# Altium PCB PCB1.PcbDoc
Units mm, origin at the board's own origin, x right, y up, seen from the top; angles counter-clockwise.
Board outline 76.2 x 76.2 mm, 2 copper layers (Top Layer, Bottom Layer); 24 components, 34 nets, 116 pads, 0 vias.
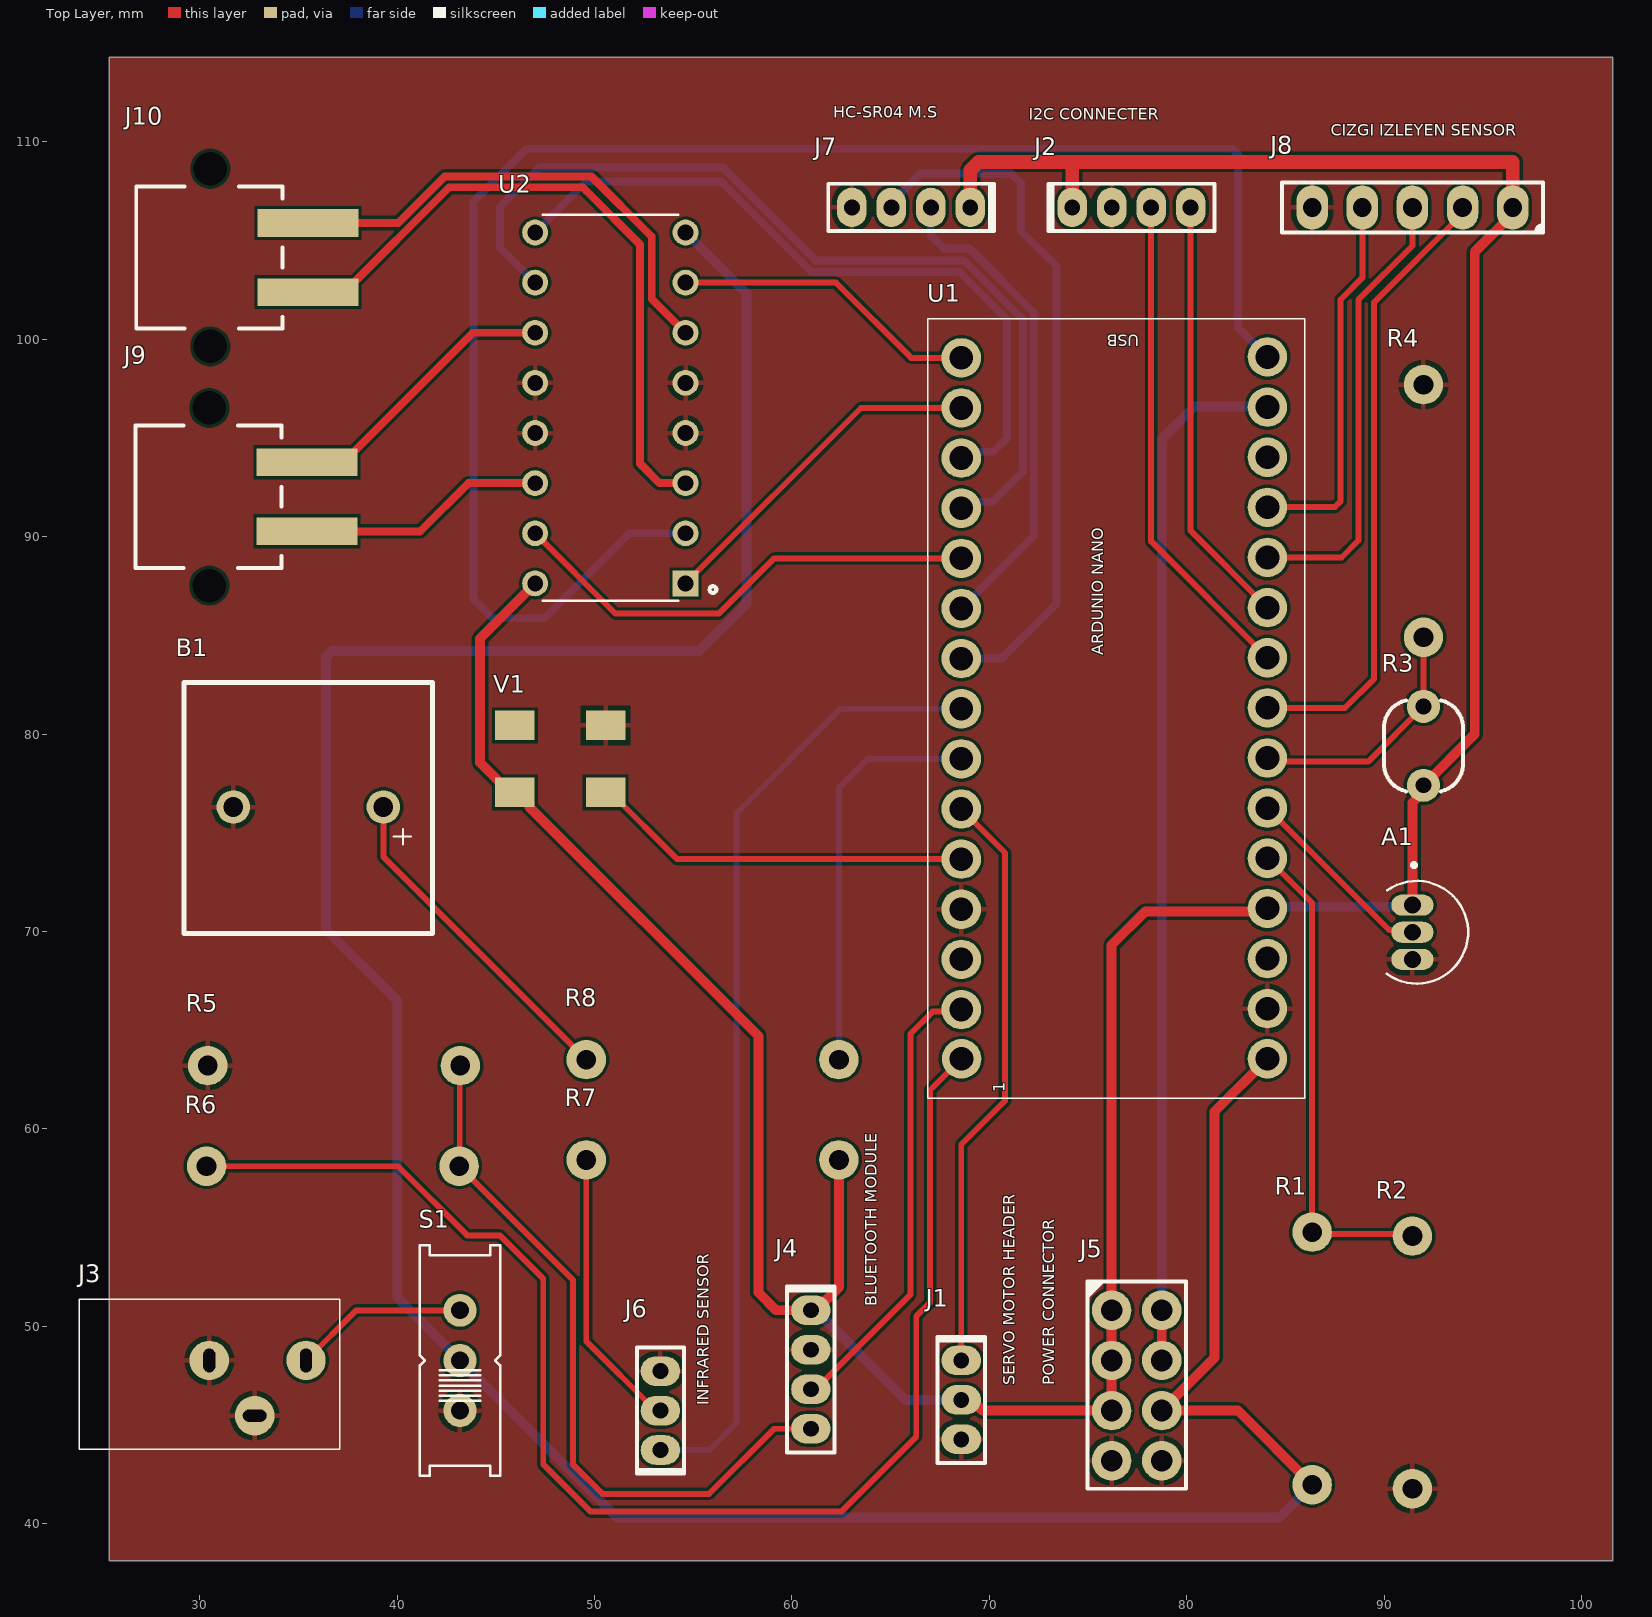
[diagram p0: Top Layer view]
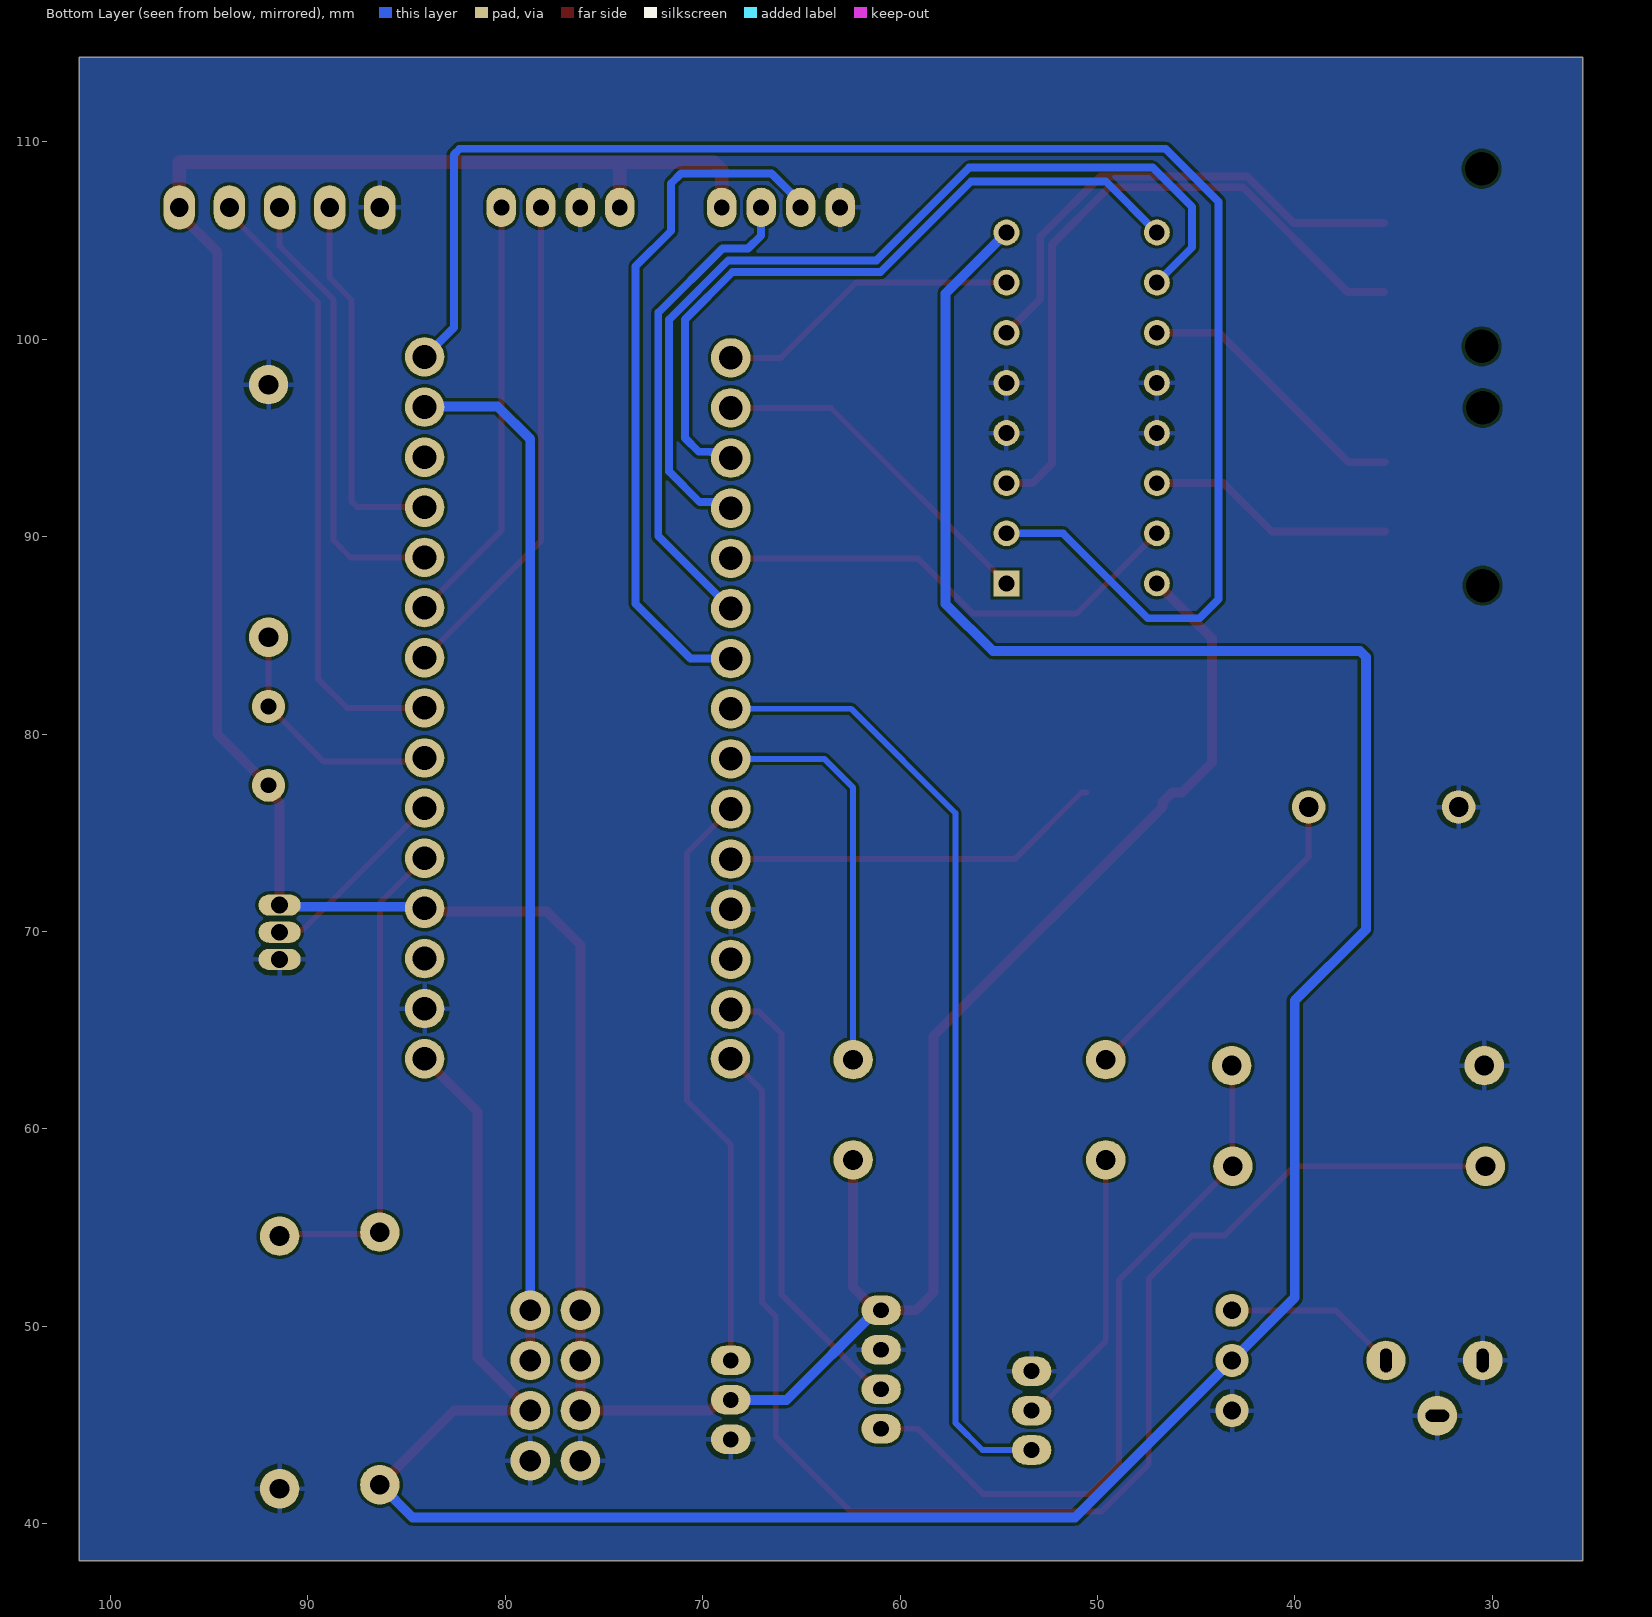
[diagram p1: Bottom Layer view, seen from below]

## Layer stack, top to bottom
Top Solder: solder mask 0.0102, Solder Resist, Dk 3.5
Top Layer: signal copper 0.0356
Dielectric 1: dielectric 0.32, FR-4, Dk 4.8
Bottom Layer: signal copper 0.0356
Bottom Solder: solder mask 0.0102, Solder Resist, Dk 3.5

## Board outline
25.4,38.1 25.4,114.3 101.6,114.3 101.6,38.1

## Design rules (kind name [scope] priority, off if disabled: settings)
Clearance [All] p1: gap=0.152 ignorepadtopadclearanceinfootprint=FALSE
PolygonConnect [All] p1: connectstyle=Relief reliefconductorwidth=0.254 reliefentries=4 polygonreliefangle="90 Angle" airgapwidth=0.254
RoutingVias [All] p1: holewidth=0.6 width=0.6 viastyle="Through Hole" minholewidth=0.3 minwidth=0.3 maxholewidth=0.9 maxwidth=1.27
SolderMaskExpansion [All] p1: expansion=0.102 istentingtop=FALSE
Width [All] p1: maxlimit=2 minlimit=0.152 preferedwidth=0.5
30 further rules are at their usual default settings.

## Components (designator, comment, footprint, x,y, rotation, side; value= is the part's Value field where it differs from the comment)
A1 "LM35DZ/NOPB" LM35DZ_TO92127P521H735-3 92.215,69.955 r270 top
B1 "Buzzer 5v" "Buzzer 5V" 39.3,76.3 r180 top
J1 "NPPN031BFCN-RC" "SULLINS NPPN031BFCN" 68.58,46.26 r270 top
J2 "NPPN041BFCN-RC" "SULLINS NPPN041BFCN" 77.2,106.68 r0 top
J3 "ardunio power jack" "ardunio uno power jack" 42.58,47.56 r180 top
J4 "NPPN041BFCN-RC" "SULLINS NPPN041BFCN" 60.96,47.8 r270 top
J5 "M20-7830442" "HARWIN M20-7830445" 77.47,46.99 r0 top
J6 "NPPN031BFCN-RC" "SULLINS NPPN031BFCN" 53.34,45.72 r90 top
J7 "NPPN041BFCN-RC" "SULLINS NPPN041BFCN" 66.04,106.68 r180 top
J8 "SSW-105-03-T-S" "SAMTEC SSW-105-03-T-S" 91.44,106.68 r180 top
J9 "691508110302" "WURTH 691508110302" 30.43,92.02 r90 top
J10 "691508110302" "WURTH 691508110302" 30.48,104.14 r90 top
R1 "RESISTOR 7KOHM" RES50 86.36,48.26 r270 top
R2 "RESISTOR 5KOHM" RES50 91.44,48.26 r90 top
R3 "LDR" LDR 92,79.4 r270 top
R4 "RESISTOR 10KOHM" RES50 92,91.4 r90 top
R5 "RESISTOR 5KOHM" RES50 36.7,63.2 r180 top
R6 "RESISTOR 10KOHM" RES50 36.84,58.1 r0 top
R7 "RESISTOR 1KOHM" RES50 55.88,58.42 r180 top
R8 "RESISTOR 1KOHM" RES50 55.88,63.5 r180 top
S1 "switch_EG1218" EG1218 43.18,48.26 r90 top
U1 "ardunio nano header PIN" "ARDUNIO NANO" 65.994,69.044 r90 top
U2 "L293B" L293B-L293D 50.8,96.52 r180 top
V1 "WS2812B" WS2812B 48.26,78.74 r90 top

## Footprints (in the part's own frame and the unit in brackets; to place one, negate y for a bottom-side part, rotate by r counter-clockwise, add the part's x,y. Pads: shape width x height; smd on the part's side, far side on the other; paste and mask are expansions set on the pad)
"ARDUNIO NANO" [mm]
  round 2 hole 1.2: 1(-5.5,-2.6) 2(-3.004,-2.586) 3(-0.464,-2.586) 4(2.076,-2.586) 5(4.616,-2.586) 6(7.156,-2.586) 7(9.696,-2.586) 8(12.236,-2.586) 9(14.776,-2.586) 10(17.316,-2.586) 11(19.856,-2.586) 12(22.396,-2.586) 13(24.936,-2.586) 14(27.476,-2.586) 15(30.016,-2.586) 16(30.06,-18.1) 17(27.52,-18.1) 18(24.98,-18.1) 19(22.44,-18.1) 20(19.9,-18.1) 21(17.36,-18.1) 22(14.82,-18.1) 23(12.28,-18.1) 24(9.74,-18.1) 25(7.2,-18.1) 26(4.66,-18.1) 27(2.12,-18.1) 28(-0.42,-18.1) 29(-2.96,-18.1) 30(-5.5,-18.1)
  silkscreen extent -7.5,-20 32,-0.9, body extent -7.02,-19.35 31.58,-1.35, height 5.5
"ardunio uno power jack" [mm]
  round 2 hole 0.6 slot 1.2 at 90 deg: 1(7.2,-0.7) 3(12.1,-0.7)
  round 2 hole 0.6 slot 1.2 at 0 deg: 2(9.8,2.1)
  silkscreen extent 5.5,-3.8 18.7,3.8, body extent 7.05,-3.2 18.15,2.25, height 7.58
"Buzzer 5V" [mm]
  round 1.7 hole 1 mask+0.05: 1(0,0) 2(7.6,0)
  silkscreen extent -2.5,-6.3 10.1,6.4, body extent -2.12,-5.91 9.72,5.91, height 8.48
EG1218 [mil]
  round 66 hole 35.43: O(-100,0) P(0,0) S(100,0)
  silkscreen extent -230,-80 230,80, body extent -228,-79 228,79, height 394
"HARWIN M20-7830445" [mm] "2.54mm DIL PC TAIL PIN HEADER ASSEMBLY"
  round 2 hole 1.1: 1(-1.27,3.81) 2(-1.27,1.27) 3(-1.27,-1.27) 4(-1.27,-3.81) 5(1.27,-3.81) 6(1.27,-1.27) 7(1.27,1.27) 8(1.27,3.81)
  silkscreen extent -2.5,-5.23 2.5,5.27, body extent -2.52,-5.28 2.52,5.28, height 8.5
L293B-L293D [mm]
  rect 1.308x1.308 hole 0.8: 1(-3.81,8.89)
  round 1.308 hole 0.8: 2(-3.81,6.35) 3(-3.81,3.81) 4(-3.81,1.27) 5(-3.81,-1.27) 6(-3.81,-3.81) 7(-3.81,-6.35) 8(-3.81,-8.89) 9(3.81,-8.89) 10(3.81,-6.35) 11(3.81,-3.81) 12(3.81,-1.27) 13(3.81,1.27) 14(3.81,3.81) 15(3.81,6.35) 16(3.81,8.89)
  silkscreen extent -5.37,-9.78 3.43,9.78, body extent -5.48,-9.6 5.68,9.58, height 5.71
LDR [mm]
  round 1.676 hole 0.8: 1(-2,0) 2(2,0)
  silkscreen extent -2.3,-2 2.3,2, body extent -2.5,-2.1 2.6,2.2, height 5.1
LM35DZ_TO92127P521H735-3 [mm]
  oval 1.07x2.14 hole 0.85 mask+0.08: 1(-1.375,-0.775) 2(0,-0.775) 3(1.375,-0.775)
  silkscreen extent -3.5,-2.08 2.6,2.04
RES50 [mm]
  round 2 hole 1: 1(6.3,0) 2(-6.5,0)
  body extent -6.75,-1.9 6.7,1.85, height 7.37
"SAMTEC SSW-105-03-T-S" [mm]
  oval 1.6x2.25 hole 0.95: 1(-5.08,0) 2(-2.54,0) 3(0,0) 4(2.54,0) 5(5.08,0)
  silkscreen extent -6.61,-1.27 6.61,1.27, body extent -6.6,-1.21 6.6,1.21, height 8.51
"SULLINS NPPN031BFCN" [mm]
  oval 1.5x2 hole 0.8: 1(-2,0) 2(0,0) 3(2,0)
  silkscreen extent -3.2,-1.2 3.2,1.2, body extent -3.25,-1.2 3.25,1.2, height 4.41
"SULLINS NPPN041BFCN" [mm]
  oval 1.5x2 hole 0.8: 1(-3,0) 2(-1,0) 3(1,0) 4(3,0)
  silkscreen extent -4.2,-1.2 4.2,1.2, body extent -4.25,-1.2 4.25,1.2, height 4.41
WS2812B [mm]
  rect 1.5x2 smd: 1(-1.7,2.3) 2(1.7,2.3) 3(1.7,-2.3) 4(-1.7,-2.3)
  body extent -2.5,-2.7 2.5,2.7, height 2.3
"WURTH 691508110302" [mm]
  rect 1.4x5.1 smd: 1(-1.75,-5) 2(1.75,-5)
  round 1 hole 1.7 unplated: M(-4.5,-0.05) M(4.5,-0.05)
  silkscreen extent -3.6,-3.7 3.6,3.7, body extent -5.18,-7.2 5.18,3.7, height 11.2

## Part data
A1: "LM35DZ TEMPERATURE SENSOR", Package=None, Availability=Unavailable, MP=LM35DZ/NOPB, price=None
J1 J6: "CONN HDR 3POS 0.079 GOLD PCB", Current Rating (Amps)=2A, Insulation Color=Black, manufacturer="Sullins Connector Solutions", Material Flammability Rating="UL94 V-0", Operating Temperature="-40°C ~ 105°C", Supplier Part Number 1=S5751-03-ND, componentlink1description=Datasheet, componentlink1url=https://drawings-pdf.s3.amazonaws.com/10483.pdf, componentlink2description="DigiKey Link", componentlink2url=https://www.digikey.com/en/products/detail/sullins-connector-solutions/NPPN031BFCN-RC/804805, Connector Type=Header, Contact Finish - Mating=Gold, Contact Finish - Post=Gold, Contact Finish Thickness - Mating=Flash, Contact Length - Post="0.094\" (2.40mm)", Contact Type="Female Socket", Fastening Type=Push-Pull, Insulation Height="0.173\" (4.40mm)", lastupdated="6/21/2022 2:42:20 PM", Lifecycle Status=Active, Minimum Order=1, Mounting Type="Through Hole", Number of Positions=3, Number of Positions Loaded=All, Number of Rows=1, packaging=Tube, Part Number=NPPN031BFCN-RC, Part Status=Active, Pitch - Mating="0.079\" (2.00mm)", price=0.25, series=-, Style="Board to Board", Supplier 1=DigiKey, Termination=Solder
J2 J4 J7: "CONN HDR 4POS 0.079 GOLD PCB", Current Rating (Amps)=2A, Insulation Color=Black, manufacturer="Sullins Connector Solutions", Material Flammability Rating="UL94 V-0", Operating Temperature="-40°C ~ 105°C", Supplier Part Number 1=S5751-04-ND, componentlink1description=Datasheet, componentlink1url=https://drawings-pdf.s3.amazonaws.com/10483.pdf, componentlink2description="DigiKey Link", componentlink2url=https://www.digikey.com/en/products/detail/sullins-connector-solutions/NPPN041BFCN-RC/804806, Connector Type=Header, Contact Finish - Mating=Gold, Contact Finish - Post=Gold, Contact Finish Thickness - Mating=Flash, Contact Length - Post="0.094\" (2.40mm)", Contact Type="Female Socket", Fastening Type=Push-Pull, Insulation Height="0.173\" (4.40mm)", lastupdated="6/21/2022 2:42:51 PM", Lifecycle Status=Active, Minimum Order=1, Mounting Type="Through Hole", Number of Positions=4, Number of Positions Loaded=All, Number of Rows=1, packaging=Tube, Part Number=NPPN041BFCN-RC, Part Status=Active, Pitch - Mating="0.079\" (2.00mm)", price=0.30, series=-, Style="Board to Board", Supplier 1=DigiKey, Termination=Solder
J3: "CONN PWR JACK 2X5.5MM SOLDER  ,PJ-102AH"
J5: "CONN RCPT 8POS 0.1 GOLD PCB", Current Rating (Amps)=3A, Insulation Color=Black, manufacturer="Harwin Inc.", Material Flammability Rating="UL94 V-0", Operating Temperature="-40°C ~ 105°C", Supplier Part Number 1=952-1789-ND, componentlink1description=Datasheet, componentlink1url=https://cdn.harwin.com/pdfs/C001XX_M20_Series_Connectors.pdf, componentlink2description="DigiKey Link", componentlink2url=http://digikey.com/product-detail/en/harwin-inc/M20-7830442/952-1789-ND/3727758, Connector Type=Receptacle, Contact Finish - Mating=Gold, Contact Finish - Post=Tin, Contact Finish Thickness - Mating=Flash, Contact Length - Post="0.118\" (3.00mm)", Contact Type="Female Socket", Fastening Type=Push-Pull, Insulation Height="0.335\" (8.51mm)", lastupdated="9/21/2022 7:04:26 PM", Lifecycle Status=Active, Mated Stacking Heights="11.04mm, 12.63mm", Minimum Order=1, Mounting Type="Through Hole", Number of Positions=8, Number of Positions Loaded=All, Number of Rows=2, packaging=Tube, Part Number=M20-7830442, Part Status=Active, Pitch - Mating="0.100\" (2.54mm)", price=1.36, Row Spacing - Mating="0.100\" (2.54mm)", series=M20, Style="Board to Board or Cable", Supplier 1=DigiKey, Termination=Solder
J8: "CONN RCPT 5POS 0.1 TIN PCB", Current Rating (Amps)="5.7A per Contact", Insulation Color=Black, manufacturer="Samtec Inc.", Material Flammability Rating="UL94 V-0", Operating Temperature="-55°C ~ 105°C", Supplier Part Number 1=SSW-105-03-T-S-ND, componentlink2description="DigiKey Link", componentlink2url=http://digikey.com/product-detail/en/samtec-inc/SSW-105-03-T-S/SSW-105-03-T-S-ND/7874640, Connector Type=Receptacle, Contact Finish - Mating=Tin, Contact Finish - Post=Tin, Contact Type=Forked, Fastening Type=Push-Pull, lastupdated="6/21/2022 3:09:09 PM", Lifecycle Status=Active, Minimum Order=1, Mounting Type="Through Hole", Number of Positions=5, Number of Positions Loaded=All, Number of Rows=1, packaging=Bulk, Part Number=SSW-105-03-T-S, Part Status=Active, price=0.85, series=SSW, Style="Board to Board or Cable", Supplier 1=DigiKey, Termination=Solder
J9 J10: "TERM BLOCK 2POS 3.5MM SMD", Color=Black, Current=10A, manufacturer="Würth Elektronik", Supplier Part Number 1=732-5963-1-ND, Voltage=300V, componentlink1description=Datasheet, componentlink1url=https://katalog.we-online.de/em/datasheet/6915081103xx.pdf, componentlink2description="DigiKey Link", componentlink2url=http://digikey.com/product-detail/en/w-rth-elektronik/691508110302/732-5963-1-ND/5047612, Features="Board Guide, Mounting Flange", lastupdated="1/15/2020 4:18:55 AM", Lifecycle Status=Active, Mating Orientation="Horizontal and Vertical with Board", Minimum Order=1, Mounting Type="Surface Mount", Number of Levels=1, packaging=TapeAndReel, Part Number=691508110302, Part Status=Active, Pitch="0.138\" (3.50mm)", Positions Per Level=2, price=1.57, series="WR-TBL Series 5081", Supplier 1=DigiKey, Wire Gauge="16-30 AWG", Wire Termination="Screw - Rising Cage Clamp"
R3: Package=None, Availability="In Stock", Check_prices=https://www.snapeda.com/parts/LDR/Applied+Avionics/view-part/?ref=eda, MF="Fairway Electronics", MP=LDR, price=None, SnapEDA_Link=https://www.snapeda.com/parts/LDR/Applied+Avionics/view-part/?ref=snap
R7 R8: library part "RESISTOR 5KOHM", "RESISTOR 5KOHM"
S1: "<b>SLIDING SWITCH</b><p> 0.1\" spacing through hole, vertical SPDT slide switch <p>http://www.ladyada.net/library/pcb/eaglelibrary.html</p>", Package=None, Availability=Unavailable, MP=EG1218, price=None
U1: library part "ardunio nanoheader", "ardunio nanoheader pin 2x15"
U2: "L293D ve L293B motor sürücü entegreleri içlerinde iki adet H köprüsü barındıran 16 bacaklı motor sürücü entegrelerdir. Genellikle DC motor kontrolünde tercih edilen motor sürücü entegreler olan L293D ve L293B ile iki motor birbirinden bağımsız olarak çift yönlü kontrol edilebilmektedir."
V1: "BIR CESIT LED , BUNUN ILE TREN YAPARSIN DIN 'I ARDUNIO YA BAGLA ,DOUT 'UDA BASKA WS2812B 'NIN DIN'INA BAGLA BOYLE TREN OLUR SERIT LED GIBI"

## Nets (pads, with @x,y where several pads share a name; then routed paths per layer and width w, separated by ;. In a path a pad name is that pad's centre, name@x,y a point inside that pad or via, vN(x,y) a via of type N, cw(c..) or ccw(c..) an arc to the next point about the centre after c; other vN are vias at no path point)
3V: J5.7 J5.8 U1.17 | length 52.7
  Top Layer w0.5: J5.7 J5.8
  Bottom Layer w0.5: J5.8 78.74,94.94 80.4,96.6 84.058,96.6 U1.17
5V: A1.1 J1.2 J2.1 J4.1 J5.1 J5.2 J5.3 J7.1 J8.1 R3.2 R7.2 U1.27 U2.16 V1.1 | length 183.3
  Top Layer w0.5: U2.16 44.2,84.84 44.2,78.55 45.71,77.04 V1.1 46.21,77.04 46.71,76.54 46.71,76.29 58.3,64.7 58.3,51.7 59.2,50.8 J4.1 61.21,50.8 62.38,51.97 R7.2 ; J1.2 69.101,46.26 69.641,45.72 J5.3 J5.2 J5.1 76.2,69.3 77.9,71 83.93,71 U1.27 ; A1.1 91.44,76.522 92,77.082 R3.2 94.6,80 94.6,104.435 96.52,106.355 J8.1
  Top Layer w0.7: J7.1 69.04,108.577 69.45,108.987 74.1,108.987 ; J2.1 74.2,108.887 74.1,108.987 ; J8.1 96.52,108.987 74.1,108.987
  Bottom Layer w0.5: J4.1 61.21,50.8 65.75,46.26 J1.2 ; U1.27 84.177,71.247 91.357,71.247 A1.1
BT-RX: J4.4 R5.2 R6.1 | length 36.7
  Top Layer w0.3: R5.2 43.17,63.17 43.17,58.13 R6.1 48.9,52.34 48.9,43 50.4,41.5 55.8,41.5 59.1,44.8 J4.4
BT-TX: J4.3 U1.2 | length 23.3
  Top Layer w0.3: J4.3 61.21,46.8 66,51.59 66,64.8 67.13,65.93 68.47,65.93 U1.2
BUZZER: R8.2 U1.7 | length 20.6
  Bottom Layer w0.3: R8.2 62.38,77.28 63.84,78.74 U1.7
ECHO: J7.3 U1.9 | length 35.6
  Bottom Layer w0.4: J7.3 65.04,106.93 66.51,108.4 71.1,108.4 71.6,107.9 71.6,105.5 73.4,103.7 73.4,86.6 70.62,83.82 U1.9
GND: A1.3 B1.2 J1.3 J2.2 J3.2 J3.3 J4.2 J5.4 J5.5 J6.3 J7.4 J8.5 R2.2 R4.1 R5.1 S1.O U1.4 U1.29 U2.4 U2.5 U2.12 U2.13 V1.3
IR-RMT: J6.1 U1.8 | length 48.9
  Bottom Layer w0.3: J6.1 55.82,43.72 57.2,45.1 57.2,76 62.48,81.28 U1.8
LDR: R3.1 R4.2 U1.24 | length 12.6
  Top Layer w0.3: U1.24 84.278,78.6 89.2,78.6 R3.1 R4.2
LINE-C: J8.3 U1.20 | length 23
  Top Layer w0.3: U1.20 87.844,88.944 88.7,89.8 88.7,101.997 91.44,104.737 J8.3
LINE-L: J8.2 U1.23 | length 31.8
  Top Layer w0.3: U1.23 88.024,81.324 89.5,82.8 89.5,101.875 93.98,106.355 J8.2
LINE-R: J8.4 U1.19 | length 19.2
  Top Layer w0.3: U1.19 84.11,91.5 87.507,91.5 87.8,91.793 87.8,102.019 88.9,103.119 J8.4
M-ENA: U1.14 U2.1 | length 17.7
  Top Layer w0.3: U2.1 63.5,96.52 U1.14
M-ENB: U1.13 U2.9 | length 36.6
  Bottom Layer w0.4: U2.9 49.58,108 56.4,108 61,103.4 68.5,103.4 70.9,101 70.9,95 70.2,94.3 69.614,94.3 69.6,94.286 68.886,94.286 U1.13
M-IN1: U1.16 U2.2 | length 83.9
  Bottom Layer w0.4: U2.2 51.751,90.17 47.447,85.866 44.834,85.866 43.866,86.834 43.866,106.966 46.552,109.652 82.314,109.652 82.6,109.366 82.6,100.598 U1.16
M-IN2: U1.15 U2.7 | length 15.5
  Top Layer w0.3: U2.7 62.23,102.87 66.04,99.06 U1.15
M-IN3: U1.12 U2.10 | length 46.7
  Bottom Layer w0.4: U2.10 45.2,104.66 45.2,106.7 47.2,108.7 56.5,108.7 61.2,104 68.7,104 71.7,101 71.7,93.3 70.146,91.746 68.886,91.746 U1.12
M-IN4: U1.11 U2.15 | length 24.4
  Top Layer w0.3: U2.15 51.06,86.1 56.3,86.1 59.1,88.9 U1.11
MOTOR1-A: J10.1 U2.3 | length 34
  Top Layer w0.4: J10.1 37.33,102.39 42.64,107.7 49.4,107.7 49.599,107.501 52.3,104.8 52.3,93.7 53.29,92.71 U2.3
MOTOR1-B: J10.2 U2.6 | length 25.2
  Top Layer w0.4: J10.2 40.049,105.89 42.411,108.252 49.848,108.252 52.9,105.2 52.9,102.04 U2.6
MOTOR2-A: J9.1 U2.14 | length 12.6
  Top Layer w0.4: J9.1 41.17,90.27 43.61,92.71 U2.14
MOTOR2-B: J9.2 U2.11 | length 14.3
  Top Layer w0.4: J9.2 37.28,93.77 43.84,100.33 U2.11
NetB1_1: B1.1 R8.1 | length 17.1
  Top Layer w0.3: B1.1 39.3,73.78 R8.1
NetJ3_1: J3.1 S1.S | length 8.9
  Top Layer w0.3: J3.1 37.92,50.8 S1.S
NetJ6_2: J6.2 R7.1 | length 14.4
  Top Layer w0.3: R7.1 49.58,49.23 53.09,45.72 J6.2
NetR6_2: R6.2 U1.1 | length 70.4
  Top Layer w0.3: R6.2 40.043,58.1 43.543,54.6 45.2,54.6 47.4,52.4 47.4,43 49.8,40.6 62.5,40.6 66.3,44.4 66.3,50.5 67,51.2 67,61.95 U1.1
SCL: J2.4 U1.21 | length 21.9
  Top Layer w0.3: J2.4 80.2,90.298 U1.21
SDA: J2.3 U1.22 | length 25.3
  Top Layer w0.3: J2.3 78.2,89.758 U1.22
SERVO: J1.1 U1.6 | length 29.8
  Top Layer w0.3: J1.1 68.58,59.197 70.8,61.417 70.8,73.98 U1.6
TEMP: A1.2 U1.25 | length 10
  Top Layer w0.3: U1.25 90.274,70.064 91.331,70.064 A1.2
TRIGGER: J7.2 U1.10 | length 24.8
  Bottom Layer w0.4: J7.2 67.04,105.26 67.7,104.6 69,104.6 72.252,101.348 72.252,90.032 U1.10
V_SENS: R1.2 R2.1 U1.26 | length 25
  Top Layer w0.3: U1.26 86.36,71.438 R1.2 86.46,54.66 91.34,54.66 R2.1
VIN: J5.6 R1.1 S1.P U1.30 U2.8 | length 157.3
  Top Layer w0.5: U1.30 81.417,60.867 81.417,48.397 J5.6 82.6,45.72 R1.1
  Bottom Layer w0.5: U2.8 57.693,102.327 57.693,86.593 55.3,84.2 36.693,84.2 36.4,83.907 36.4,70.1 40,66.5 40,51.44 S1.P 51.14,40.3 84.7,40.3 R1.1
VS2812B: U1.5 V1.4 | length 19.4
  Top Layer w0.3: V1.4 50.81,77.04 54.19,73.66 U1.5
pads on no net: J9.M J10.M U1.3 U1.18 U1.28 V1.2

## Polygon pours and split planes (outlines as drawn)
GND on Bottom Layer "GND_L02_P000" (solid, pour order 0): 25.4,114.3 25.4,38.1 101.6,38.1 101.6,114.3
GND on Top Layer "GND_L01_P001" (solid, pour order 1): 25.4,114.3 25.4,38.1 101.6,38.1 101.6,114.3

## Silkscreen, mask and mechanical layers (free items; w line width, h text height)
Top Overlay:
  text "HC-SR04 M.S" at 62.1,111.011 h1
  text "I2C CONNECTER" at 72,110.911 h1
  text "CIZGI IZLEYEN SENSOR" at 87.3,110.111 h1
  text "ARDUNIO NANO" at 75.989,84 h1 r90
  text "BLUETOOTH MODULE" at 64.489,51 h1 r90
  text "SERVO MOTOR HEADER" at 71.489,47 h1 r90
  text "POWER CONNECTOR" at 73.489,47 h1 r90
  text "INFRARED SENSOR" at 55.989,46 h1 r90
Mechanical 1:
  the board outline again, w0.1

## Text inside footprints (layer, text, board x,y; h text height)
U1: Top Overlay "USB" at 77.594,100.433 h1 r180; Top Overlay "1" at 70.994,61.844 h1 r90